# EAGLE board esquemático_módulo_v18 (EAGLE 9.7.0)
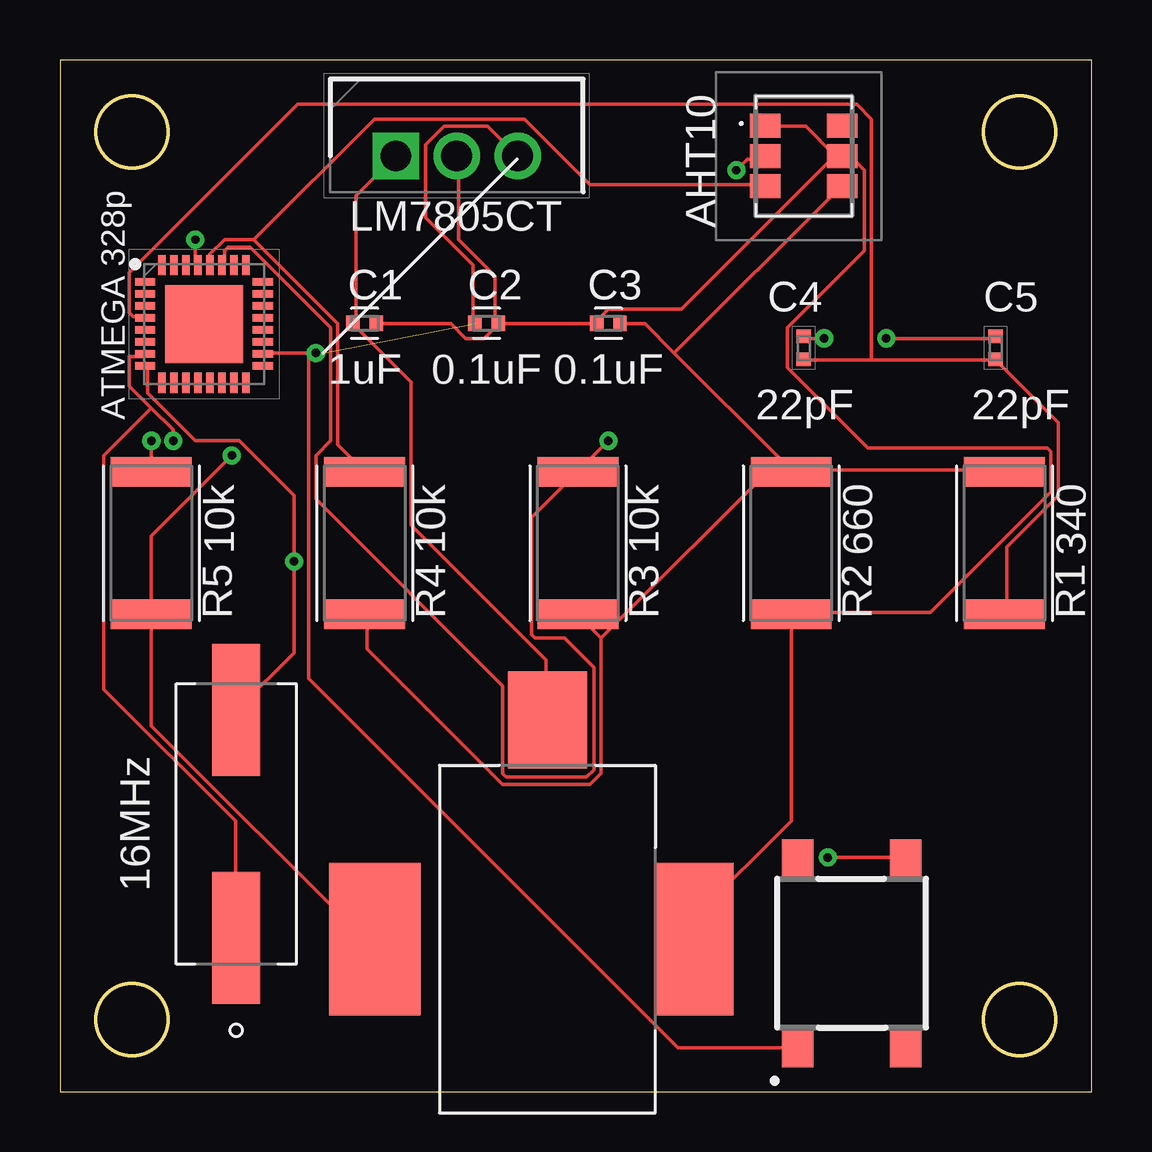
[diagram p0: board, top side]
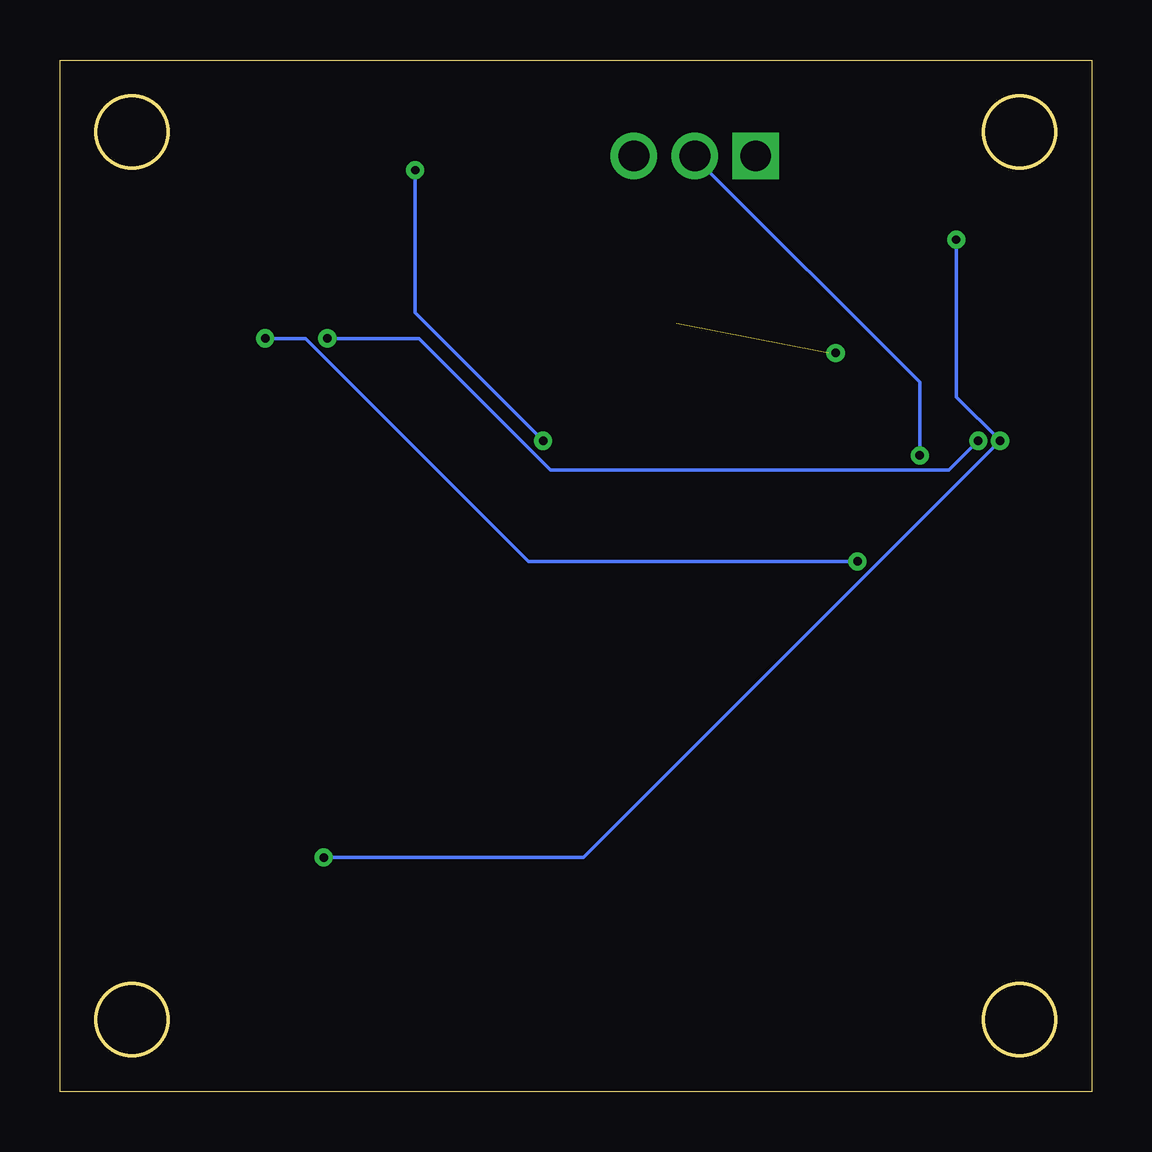
[diagram p1: board, bottom side, seen from below]

Size 43 x 43 mm. Coordinates in mm from the lower left corner, seen from the top.
Outline: 0,0 43,0 43,43 0,43 0,0
Outline: circle at 3,40 radius 1.5
Outline: circle at 3,3 radius 1.5
Outline: circle at 40,3 radius 1.5
Outline: circle at 40,40 radius 1.5
Copper layers (1*16): Top 0.035mm / dielectric 1.5mm / Bottom 0.035mm
Design rules "default": minimum track width 6mil, minimum drill 0.35mm, track to track 6mil, track to pad 6mil, pad to pad 6mil, via to via 6mil, smd to smd 6mil, copper to edge 40mil, drill to drill 6mil, minimum pad ring 10mil, minimum via ring 8mil, stop-mask expansion 4mil, vias tented up to drill 0mil, thermal gap 10mil

## Footprints (pad centres in the part's own frame; a part is rotated, then mirrored left to right if it is on the bottom)
CAPC1005X60 = smd 0.56 x 0.629: 1 -0.485,0; 2 0.485,0
CAPC1005X55N = smd 0.56 x 0.62: 1 -0.48,0; 2 0.48,0
AHT10 = smd 1.27 x 1: 1 -1.6,1.27; 2 -1.6,0; 3 -1.6,-1.27; 4 1.6,-1.27; 5 1.6,0; 6 1.6,1.27
QFN50P500X500X100-33N = smd 0.85 x 0.3: 1 -2.45,1.75; 2 -2.45,1.25; 3 -2.45,0.75; 4 -2.45,0.25; 5 -2.45,-0.25; 6 -2.45,-0.75; 7 -2.45,-1.25; 8 -2.45,-1.75; 17 2.45,-1.75; 18 2.45,-1.25; 19 2.45,-0.75; 20 2.45,-0.25; 21 2.45,0.25; 22 2.45,0.75; 23 2.45,1.25; 24 2.45,1.75 | smd 0.3 x 0.85: 9 -1.75,-2.45; 10 -1.25,-2.45; 11 -0.75,-2.45; 12 -0.25,-2.45; 13 0.25,-2.45; 14 0.75,-2.45; 15 1.25,-2.45; 16 1.75,-2.45; 25 1.75,2.45; 26 1.25,2.45; 27 0.75,2.45; 28 0.25,2.45; 29 -0.25,2.45; 30 -0.75,2.45; 31 -1.25,2.45; 32 -1.75,2.45 | smd 3.25 x 3.25: 33 0,0
TO254P470X1028X1955-3P = drill 1.29 pad 1.935 square: 1 0,0 | drill 1.29 pad 1.935: 2 2.54,0; 3 5.08,0
RASM722X = smd 3.3 x 4.06: PIN 0,9.14 | smd 3.3 x 6.35: SHUNT 6.1,0 | smd 3.81 x 6.35: SLEEVE -7.19,0
RESC6332X71 = smd 1.231 x 3.37: 1 -2.97,0; 2 2.97,0
430182070816 = smd 1.55 x 1.3: 1 -3.975,2.25; 2 -3.975,-2.25; 3 3.975,2.25; 4 3.975,-2.25
XTAL1170X500X450N = smd 5.5 x 2: 1 -4.75,0; 2 4.75,0

## Placement (x,y rotation side)
C1  1uF  [CAPC1005X60]  12.7,32.02 0 top
C2  0.1uF  [CAPC1005X60]  17.78,32.02 0 top
C3  0.1uF  [CAPC1005X60]  22.86,32.02 0 top
C4  VJ0402A560FXQCW1BC  [CAPC1005X55N]  31,31 90 top
C5  VJ0402A560FXQCW1BC  [CAPC1005X55N]  39,31 90 top
IC1  AHT10  [AHT10]  31,39 0 top
IC2  ATMEGA328P-MNR  [QFN50P500X500X100-33N]  6,32 0 top
IC3  LM7805CT  [TO254P470X1028X1955-3P]  14,39 0 top
J1  RASM722  [RASM722X]  20.32,6.35 0 top
R1  340  [RESC6332X71]  39.37,22.86 90 top
R2  660  [RESC6332X71]  30.48,22.86 90 top
R3  10k  [RESC6332X71]  21.59,22.86 90 top
R4  10k  [RESC6332X71]  12.7,22.86 90 top
R5  10k  [RESC6332X71]  3.81,22.86 90 top
S1  430182050816  [430182070816]  33,5.77 90 top
XTAL1  16MHz  [XTAL1170X500X450N]  7.35,11.16 90 top

## Library data of the parts
C1-C3 = Capacitor; CATEGORY: Capacitor
C4 C5 = Capacitor; DESCRIPTION: Multilayer Ceramic Capacitors MLCC - SMD/SMT 0402 56pF 10volts C0G 1%; HEIGHT: 0.55mm; MANUFACTURER_NAME: Vishay; MANUFACTURER_PART_NUMBER: VJ0402A560FXQCW1BC; MOUSER_PART_NUMBER: 77-VJ0402A560FXQCBC; MOUSER_PRICE-STOCK: https://www.mouser.com/Search/Refine.aspx?Keyword=77-VJ0402A560FXQCBC
IC1 = AHT10; DESCRIPTION: AHT10 Integrated temperature and humidity sensor; HEIGHT: 1.7mm; MANUFACTURER_NAME: Aosong (Guangzhou) Elec; MANUFACTURER_PART_NUMBER: AHT10
IC2 = ATMEGA328P; ARROW_PART_NUMBER: ATMEGA328P-MNR; ARROW_PRICE-STOCK: https://www.arrow.com/en/products/atmega328p-mnr/microchip-technology?region=nac; DESCRIPTION: 8-bit Microcontrollers - MCU AVR 32K FLSH 2K SRAM 1KB EE-20 MHZ 105C; HEIGHT: 1mm; MANUFACTURER_NAME: Microchip; MANUFACTURER_PART_NUMBER: ATMEGA328P-MNR; MOUSER_PART_NUMBER: 556-ATMEGA328P-MNR; MOUSER_PRICE-STOCK: https://www.mouser.co.uk/ProductDetail/Microchip-Technology-Atmel/ATMEGA328P-MNR?qs=6Dg1WZIWLC5fsr6lNbxG3A%3D%3D
IC3 = LM7805CT; ARROW_PART_NUMBER: LM7805CT; ARROW_PRICE-STOCK: https://www.arrow.com/en/products/lm7805ct/texas-instruments; DESCRIPTION: Linear voltage regulator,LM7805CT 5V 1A; HEIGHT: 4.7mm; MANUFACTURER_NAME: Texas Instruments; MANUFACTURER_PART_NUMBER: LM7805CT; MOUSER_PART_NUMBER: 926-LM7805CT; MOUSER_PRICE-STOCK: https://www.mouser.co.uk/ProductDetail/Texas-Instruments/LM7805CT?qs=QbsRYf82W3EaqXeMDVwIfQ%3D%3D
J1 = Connector; CREATED_BY: PCBLayout.com; DIGI-KEY_PART_NO: RASM722X-ND; MANUFACTURER: Switchcraft Inc.; MPN: RASM722X
R1-R5 = Resistor; CATEGORY: Resistor; SUB-CATEGORY: Fixed
S1 = button; DESCRIPTION: Black Tactile Tactile Switch, NO 50 mA 1.6mm Surface Mount; HEIGHT: mm; MANUFACTURER_NAME: Wurth Elektronik; MANUFACTURER_PART_NUMBER: 430182050816; MOUSER_PART_NUMBER: 710-430182050816; MOUSER_PRICE-STOCK: https://www.mouser.co.uk/ProductDetail/Wurth-Elektronik/430182050816?qs=wr8lucFkNMUyle0jQPgWGw%3D%3D
XTAL1 = Frequency-Source; CATEGORY: Resistance Weld; DESCRIPTION: SMD Crystal; FREQUENCY: 16MHZ; MANUFRACTURER: Fox Electronics; MPN: FC4SDCBMF16.0-T1; OPERATING_TEMPERATURE: -20*C to 70*c; PART_STATUS: Active; ROHS_COMPLIANT: COMPLIANT; SERIES: C4SD; SUB_CATEGORY: Resistance Weld SMD Crystal; TOLERANCE: ±30ppm; TYPE: Crystal

## Nets
GND: C1.2 C2.2 C3.1 IC1.1 IC1.5 IC3.2 J1.SHUNT J1.SLEEVE R2.1 R5.1
N$1: IC1.3 IC2.28 R4.2
N$2: C4.2 IC2.7 XTAL1.1
N$3: C3.2 IC1.4 R1.2 R2.2 R3.1 R4.1
N$4: C5.2 IC2.8 XTAL1.2
N$5: C1.1 IC3.1 J1.PIN
N$6: IC2.5
N$7: IC1.2 IC2.27 R3.2
N$9: C2.1 IC2.18 IC3.3 S1.1
N$10: IC2.29 R5.2 S1.4
N$11: C4.1 C5.1 IC2.4 R1.1

## Tracks (layer width: path | path; a pad name or v marks a point on that pad's centre or on a via)
GND  (via drill 0.35)
  Top 0.152: J1.SLEEVE 13.11,6.4 12.65,6.4 3.81,15.24 R5.1 3.81,23.16 v7.16,26.52 | 32.31,39.01 32.46,38.86 IC1.5 | 32.31,39.01 31.09,40.23 29.41,40.23 IC1.1 | 18.29,32 17.68,31.39 16.92,31.39 16.31,32 13.26,32 C1.2 | 18.29,32 22.25,32 C3.1 22.4,32.16 22.86,32.61 25.91,32.61 32.31,39.01 | 18.29,32 C2.2 18.14,32.16 18.14,33.98 16.61,35.51 16.61,38.86 IC3.2 | 32.31,39.01 IC1.5 | J1.SHUNT 26.52,6.4 26.52,7.32 30.48,11.28 R2.1 30.48,19.96 36.27,19.96 41.3,24.99 41.3,26.67 41.15,26.82 33.68,26.82 30.33,30.18 30.33,31.85 33.53,35.05 33.53,38.41 33.07,38.86 32.61,38.86 IC1.5
  Bottom 0.152: v7.16,26.52 7.16,29.57 16.46,38.86 IC3.2
N$1
  Top 0.152: 8.08,35.51 6.86,35.51 6.25,34.9 6.25,34.59 IC2.28 | 8.08,35.51 11.58,32 11.58,26.98 12.65,25.91 R4.2 | 8.08,35.51 13.11,40.54 19.36,40.54 22.1,37.8 29.26,37.8 IC1.3
N$2  (via drill 0.35)
  Top 0.152: v31.85,31.39 31.09,31.39 C4.2 | v4.72,27.13 4.72,27.58 3.81,28.5 | 3.81,28.5 2.9,29.41 2.9,30.63 3.5,30.63 IC2.7 | 3.81,28.5 1.83,26.52 1.83,16.76 7.32,11.28 7.32,6.55 XTAL1.1
  Bottom 0.152: v31.85,31.39 28.04,31.39 22.55,25.91 5.94,25.91 v4.72,27.13
N$3
  Top 0.152: 22.55,18.9 22.55,13.26 22.1,12.8 18.44,12.8 12.8,18.44 12.8,19.81 R4.1 | 22.55,18.9 21.64,19.81 R3.1 | 30.48,25.91 30.02,26.36 | 30.02,26.36 25.6,30.79 | 25.6,30.79 24.38,32 23.47,32 C3.2 | 25.6,30.79 32.46,37.64 IC1.4 | 30.48,25.91 39.32,25.91 R1.2 | 30.48,25.91 R2.2 30.02,26.36 | 30.02,26.36 22.55,18.9
N$4  (via drill 0.35)
  Top 0.152: v34.44,31.39 38.86,31.39 C5.2 | XTAL1.2 7.47,16 9.75,18.29 v9.75,22.1 9.75,24.84 7.47,27.13 5.64,27.13 3.66,29.11 3.66,30.18 IC2.8
  Bottom 0.152: v34.44,31.39 32.77,31.39 23.47,22.1 v9.75,22.1
N$5
  Top 0.152: IC3.1 13.87,38.86 12.34,37.34 12.34,32.16 C1.1 12.19,32 14.63,29.57 14.63,23.62 20.27,17.98 20.27,15.54 J1.PIN
N$7  (via drill 0.35)
  Top 0.152: IC2.27 6.86,34.59 6.86,35.05 7.01,35.2 7.92,35.2 11.28,31.85 11.28,27.13 10.67,26.52 10.67,24.69 18.44,16.92 18.44,13.26 18.59,13.11 21.95,13.11 22.25,13.41 22.25,17.68 21.03,18.9 19.81,18.9 19.66,19.05 19.66,23.93 21.49,25.76 R3.2 21.64,25.91 v22.86,27.13 | v28.19,38.41 28.65,38.86 29.26,38.86 IC1.2
  Bottom 0.152: v28.19,38.41 28.19,32.46 v22.86,27.13
N$9  (via drill 0.35)  (1 unrouted)
  Top 0.152: C2.1 17.22,32.16 17.22,34.44 15.24,36.42 15.24,39.47 16,40.23 17.83,40.23 19.05,39.01 IC3.3 | 10.36,30.79 8.53,30.79 IC2.18 | 10.36,30.79 10.36,17.22 25.76,1.83 30.63,1.83 S1.1 | 10.36,30.79 v10.67,30.79
  Bottom 0.152: 10.97,30.79 v10.67,30.79 | 19.05,38.86 IC3.3
N$10  (via drill 0.35)
  Top 0.152: v5.64,35.51 5.64,34.59 IC2.29 | R5.2 v3.81,27.13 | v32,9.75 35.2,9.75 S1.4
  Bottom 0.152: v5.64,35.51 5.64,28.96 v3.81,27.13 21.18,9.75 v32,9.75
N$11
  Top 0.152: 33.83,30.48 38.86,30.48 C5.1 39.01,30.48 41.6,27.89 41.6,24.84 39.47,22.71 39.47,19.96 R1.1 | 33.83,30.48 31.09,30.48 C4.1 | 33.83,30.48 33.83,40.54 33.22,41.15 9.91,41.15 2.9,34.14 2.9,32.46 3.05,32.31 3.5,32.31 IC2.4

## Text on the board
tNames: C1 | C2 | C3 | C4 | C5 | ATMEGA 328p | 22pF | 22pF